# EAGLE board BatteryBalancer-Panel (EAGLE 9.1.3), part 1 of 2
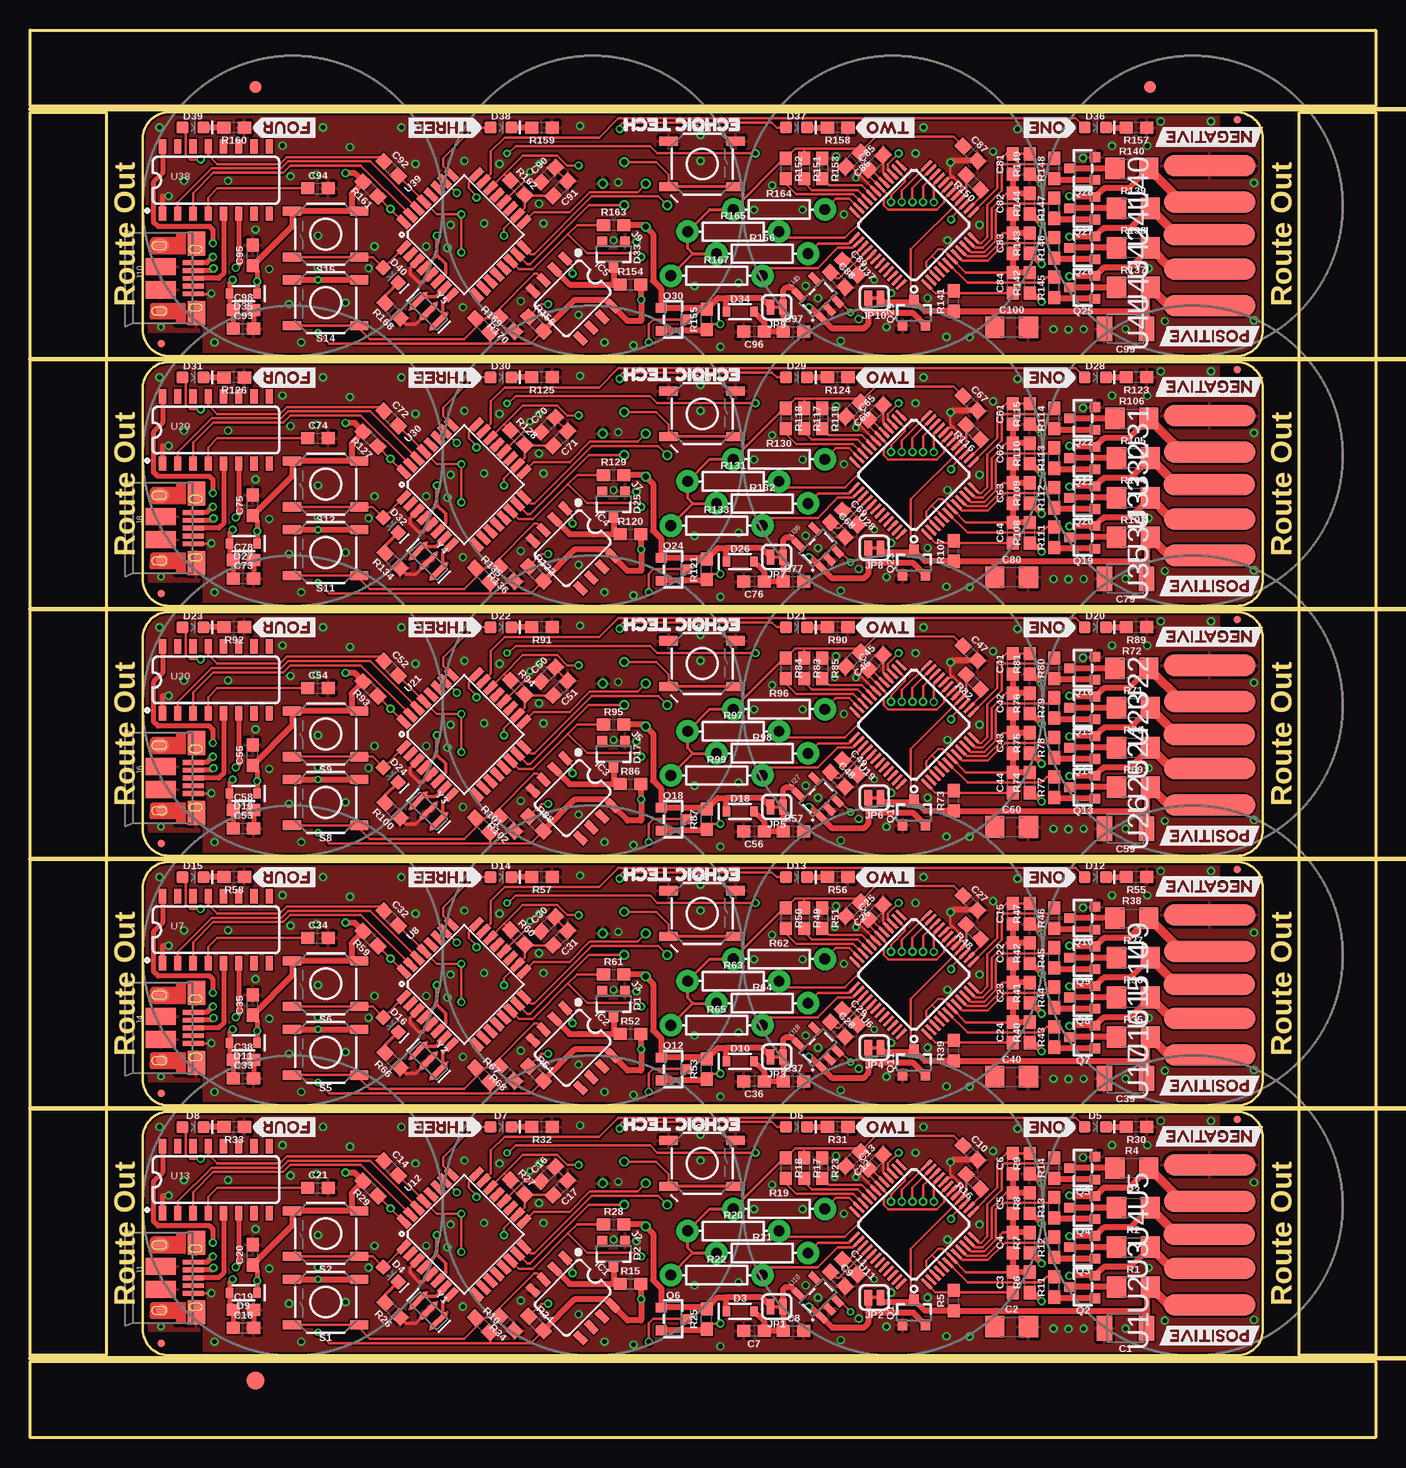
[diagram p0: board, top side]
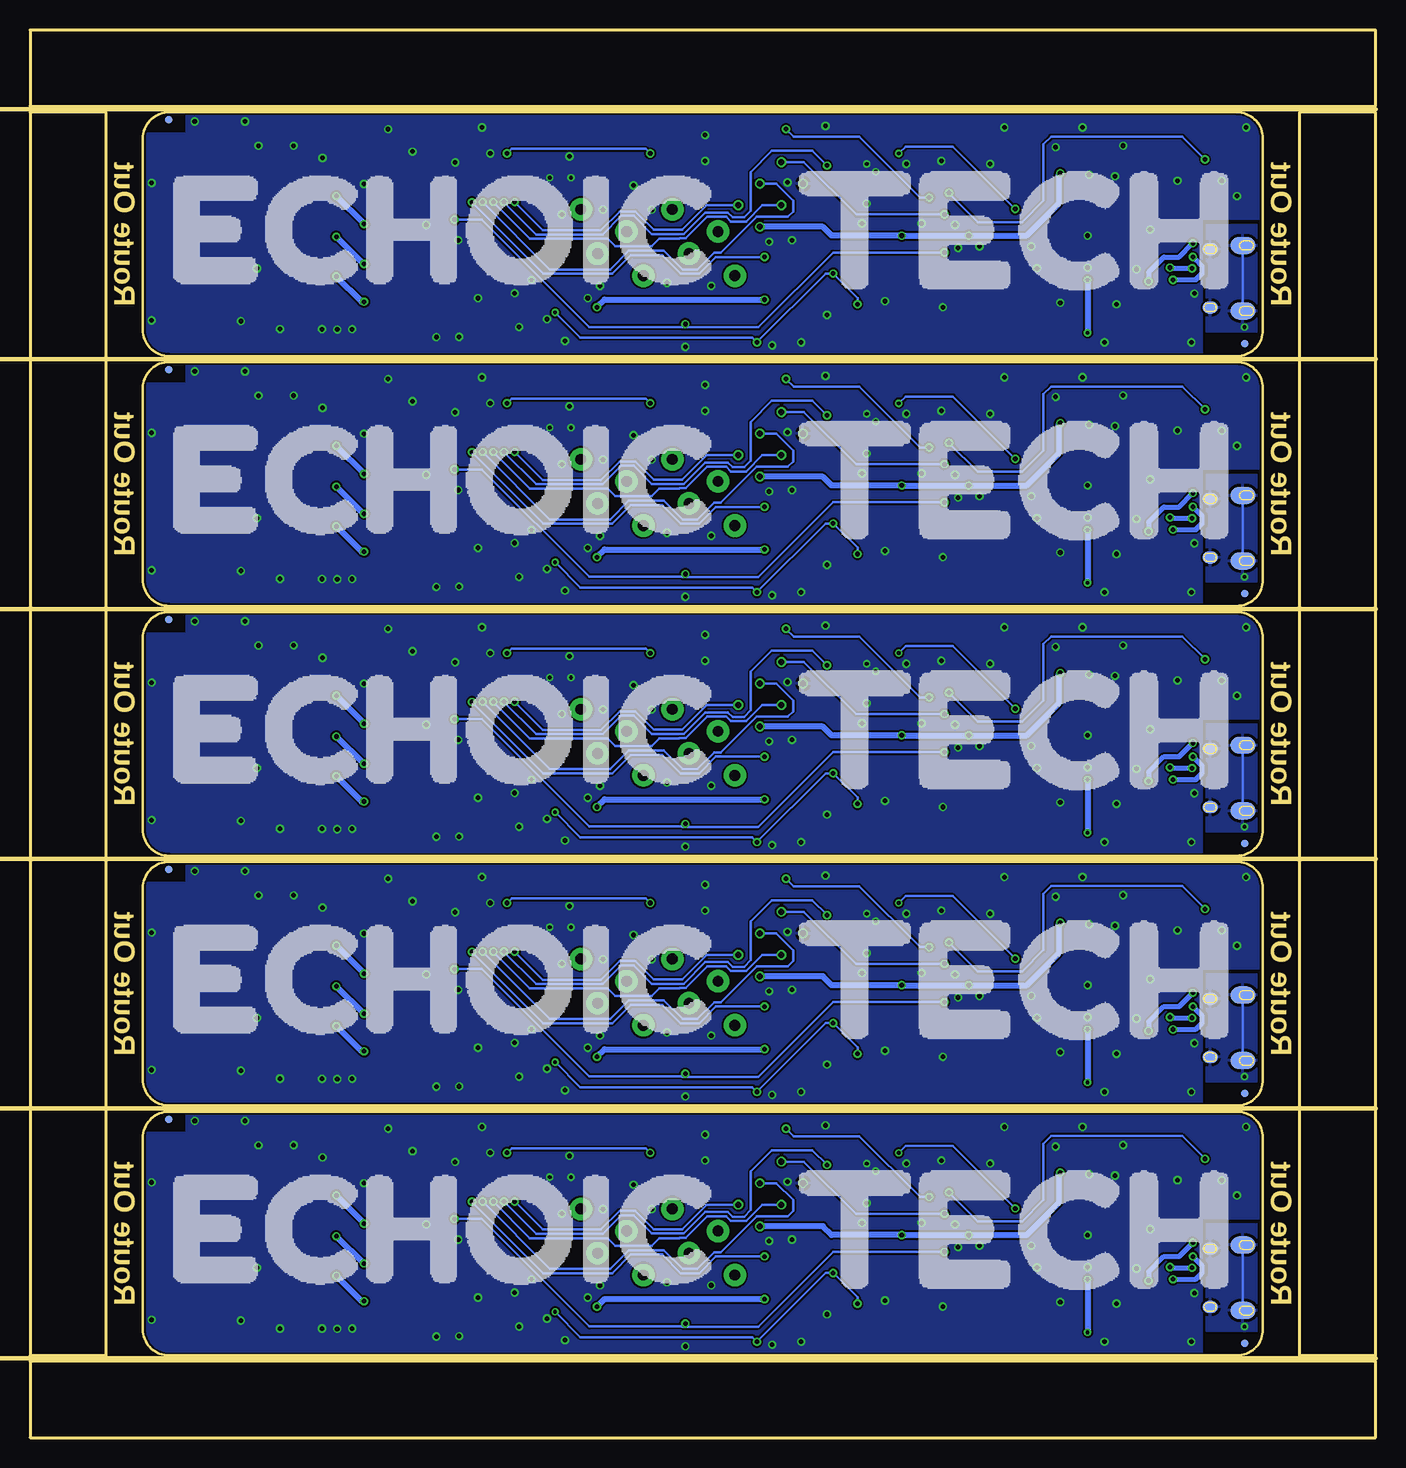
[diagram p1: board, bottom side, seen from below]

Size 112.14 x 117.35 mm. Coordinates in mm from the lower left corner, seen from the top.
Outline: 102.74,25.01 102.74,9.03 arc-90 100.58,6.86 11.57,6.86 arc-90 9.4,9.03 9.4,25.01 arc-90 11.57,27.18 100.58,27.18 arc-90 102.74,25.01
Outline: 102.74,45.84 102.74,29.85 arc-90 100.58,27.69 11.57,27.69 arc-90 9.4,29.85 9.4,45.84 arc-90 11.57,48.01 100.58,48.01 arc-90 102.74,45.84
Outline: 102.74,66.67 102.74,50.68 arc-90 100.58,48.51 11.57,48.51 arc-90 9.4,50.68 9.4,66.67 arc-90 11.57,68.83 100.58,68.83 arc-90 102.74,66.67
Outline: 102.74,87.49 102.74,71.51 arc-90 100.58,69.34 11.57,69.34 arc-90 9.4,71.51 9.4,87.49 arc-90 11.57,89.66 100.58,89.66 arc-90 102.74,87.49
Outline: 102.74,108.32 102.74,92.34 arc-90 100.58,90.17 11.57,90.17 arc-90 9.4,92.34 9.4,108.32 arc-90 11.57,110.49 100.58,110.49 arc-90 102.74,108.32
Outline: 0,6.35 112.14,6.35 112.14,0 0,0 0,6.35
Outline: 105.79,110.49 112.14,110.49 112.14,6.86 105.79,6.86 105.79,110.49
Outline: 0,117.35 112.14,117.35 112.14,111 0,111 0,117.35
Outline: 0,110.49 6.35,110.49 6.35,6.86 0,6.86 0,110.49
Copper layers (1*16): Top 0.035mm / dielectric 1.5mm / Bottom 0.035mm
Design rules "SparkFun-2-layer-PCBWay-LIMIT": minimum track width 6mil, minimum drill 0.3mm, track to track 6mil, track to pad 6mil, pad to pad 6mil, via to via 6mil, smd to smd 6mil, copper to edge 6mil, drill to drill 6mil, minimum pad ring 6mil, minimum via ring 6mil, stop-mask expansion 4mil, vias tented up to drill 25mil, thermal gap 10mil
Milling: 6 lines

## Footprints (pad centres in the part's own frame; a part is rotated, then mirrored left to right if it is on the bottom)
1210 = smd 1.27 x 2.06: 1 -1.755,0; 2 1.755,0
1206 = smd 1.6 x 1.8: 1 -1.4,0; 2 1.4,0
0603 = smd 1.1 x 1: 1 -0.85,0; 2 0.85,0
SOT23-3 = smd 0.8 x 0.9: 1 -0.95,-1; 2 0.95,-1; 3 0,1.1
SOD-323 = smd 0.63 x 0.83: A 1.15,0; C -1.15,0
LED-0603 = smd 1 x 1: A -0.877,0; C 0.877,0
FIDUCIAL-1X2 = smd 1 x 1: 1 0,0
FIDUCIAL-1.5X3 = smd 1.5 x 1.5: 1 0,0
FIDUCIAL-MICRO = smd 0.635 x 0.635: 1 0,0
SO08 = smd 0.6 x 1.2: 1 -1.905,-2.8; 2 -0.635,-2.8; 3 0.635,-2.8; 4 1.905,-2.8; 5 1.905,2.8; 6 0.635,2.8; 7 -0.635,2.8; 8 -1.905,2.8
USB-MICROB-PTH-MILL = smd 0.4 x 1.75: D+ 0,0; D- -0.65,0; GND 1.3,0; ID 0.65,0; VBUS -1.3,0 | smd 2 x 1.46: SHIELD -2.9,0.275; SHIELD2 2.9,0.275 | smd 1.425 x 2.5: SHIELD3 -0.963,-2.675; SHIELD4 0.963,-2.675 | smd 1.4 x 2.1 bottom: SHIELD5 -2.731,-2.531; SHIELD7 2.729,-2.531 | smd 1 x 1: SHIELD6 2.7,-2.575 | smd 1.1 x 1.5: SHIELD8 -2.731,-2.731 | smd 1 x 1.3 bottom: SHIELD9 -2.43,0.195; SHIELD10 2.43,0.195
2X3_TEST_POINTS = drill 0.508: 1 -2.54,-1.27; 2 -2.54,1.27; 3 0,-1.27; 4 0,1.27; 5 2.54,-1.27; 6 2.54,1.27
SMT-JUMPER_2_NC_TRACE_SILK = smd 0.635 x 1.27: 1 -0.508,0; 2 0.508,0
AXIAL-0.3 = drill 0.9 pad 1.88: P$1 -3.81,0; P$2 3.81,0
TACTILE_SWITCH_SMD_5.2MM = smd 1.524 x 0.762: 1 -2.794,1.905; 2 2.794,1.905; 3 -2.794,-1.905; 4 2.794,-1.905
1X01_SMD_0.1IN = smd 1.778 x 7.62: 1 0,0
LQFP-48 = smd 0.254 x 1.143: 1 -2.75,-4.25; 2 -2.25,-4.25; 3 -1.75,-4.25; 4 -1.25,-4.25; 5 -0.75,-4.25; 6 -0.25,-4.25; 7 0.25,-4.25; 8 0.75,-4.25; 9 1.25,-4.25; 10 1.75,-4.25; 11 2.25,-4.25; 12 2.75,-4.25; 25 2.75,4.25; 26 2.25,4.25; 27 1.75,4.25; 28 1.25,4.25; 29 0.75,4.25; 30 0.25,4.25; 31 -0.25,4.25; 32 -0.75,4.25; 33 -1.25,4.25; 34 -1.75,4.25; 35 -2.25,4.25; 36 -2.75,4.25 | smd 1.143 x 0.254: 13 4.25,-2.75; 14 4.25,-2.25; 15 4.25,-1.75; 16 4.25,-1.25; 17 4.25,-0.75; 18 4.25,-0.25; 19 4.25,0.25; 20 4.25,0.75; 21 4.25,1.25; 22 4.25,1.75; 23 4.25,2.25; 24 4.25,2.75; 37 -4.25,2.75; 38 -4.25,2.25; 39 -4.25,1.75; 40 -4.25,1.25; 41 -4.25,0.75; 42 -4.25,0.25; 43 -4.25,-0.25; 44 -4.25,-0.75; 45 -4.25,-1.25; 46 -4.25,-1.75; 47 -4.25,-2.25; 48 -4.25,-2.75
SO016 = smd 0.6 x 1.2: 1 -4.445,-2.8; 2 -3.175,-2.8; 3 -1.905,-2.8; 4 -0.635,-2.8; 5 0.635,-2.8; 6 1.905,-2.8; 7 3.175,-2.8; 8 4.445,-2.8; 9 4.445,2.8; 10 3.175,2.8; 11 1.905,2.8; 12 0.635,2.8; 13 -0.635,2.8; 14 -1.905,2.8; 15 -3.175,2.8; 16 -4.445,2.8
TQFP32-08 = smd 1.27 x 0.559: 1 -4.293,2.8; 2 -4.293,2; 3 -4.293,1.2; 4 -4.293,0.4; 5 -4.293,-0.4; 6 -4.293,-1.2; 7 -4.293,-2; 8 -4.293,-2.8; 17 4.293,-2.8; 18 4.293,-2; 19 4.293,-1.2; 20 4.293,-0.4; 21 4.293,0.4; 22 4.293,1.2; 23 4.293,2; 24 4.293,2.8 | smd 0.559 x 1.27: 9 -2.8,-4.293; 10 -2,-4.293; 11 -1.2,-4.293; 12 -0.4,-4.293; 13 0.4,-4.293; 14 1.2,-4.293; 15 2,-4.293; 16 2.8,-4.293; 25 2.8,4.293; 26 2,4.293; 27 1.2,4.293; 28 0.4,4.293; 29 -0.4,4.293; 30 -1.2,4.293; 31 -2,4.293; 32 -2.8,4.293
SOT23-5 = smd 0.55 x 1.2: 1 -0.95,-1.3; 2 0,-1.3; 3 0.95,-1.3; 4 0.95,1.3; 5 -0.95,1.3
RESONATOR-SMD-3.2X1.3 = smd 0.45 x 1.905: 1 -1.2,0; 2 0,0; 3 1.2,0

## Placement (x,y rotation side)
C1  10uF  [1210]  91.29,9.12 180 top
C2  1.0uF  [1206]  81.8,9.26 0 top
C3  0.1uF  [0603]  81.91,12.95 90 top
C4  0.1uF  [0603]  81.91,16.26 90 top
C5  0.1uF  [0603]  81.91,19.56 90 top
C6  0.1uF  [0603]  81.91,22.86 90 top
C7  1.0uF  [0603]  60.33,8.89 180 top
C8  0.1uF  [0603]  63.63,8.89 0 top
C9  1.0uF  [0603]  67.31,13.21 315 top
C10  0.1uF  [0603]  78.36,23.75 315 top
C11  1.0uF  [0603]  68.33,14.22 315 top
C12  0.1uF  [0603]  68.58,23.24 225 top
C13  1.0uF  [0603]  70.48,22.99 45 top
C14  0.1uF  [0603]  30.1,22.48 315 top
C15  0.1uF  [0603]  81.91,43.69 90 top
C16  0.1uF  [0603]  43.18,21.97 45 top
C17  0.1uF  [0603]  44.2,20.83 225 top
C18  0.1uF  [0603]  17.78,9.14 0 top
C19  1.0uF  [0603]  17.78,10.67 0 top
C20  0.1uF  [0603]  18.54,15.24 90 top
C21  10nF  [0603]  24,20.83 0 top
C22  0.1uF  [0603]  81.91,40.39 90 top
C23  0.1uF  [0603]  81.91,37.08 90 top
C24  0.1uF  [0603]  81.91,33.78 90 top
C25  1.0uF  [0603]  70.48,43.81 45 top
C26  0.1uF  [0603]  68.58,44.07 225 top
C27  0.1uF  [0603]  78.36,44.58 315 top
C28  1.0uF  [0603]  67.31,34.04 315 top
C29  1.0uF  [0603]  68.33,35.05 315 top
C30  0.1uF  [0603]  43.18,42.8 45 top
C31  0.1uF  [0603]  44.2,41.66 225 top
C32  0.1uF  [0603]  30.1,43.31 315 top
C33  0.1uF  [0603]  17.78,29.97 0 top
C34  10nF  [0603]  24,41.66 0 top
C35  0.1uF  [0603]  18.54,36.07 90 top
C36  1.0uF  [0603]  60.33,29.72 180 top
C37  0.1uF  [0603]  63.63,29.72 0 top
C38  1.0uF  [0603]  17.78,31.5 0 top
C39  10uF  [1210]  91.29,29.95 180 top
C40  1.0uF  [1206]  81.8,30.08 0 top
C41  0.1uF  [0603]  81.91,64.52 90 top
C42  0.1uF  [0603]  81.91,61.21 90 top
C43  0.1uF  [0603]  81.91,57.91 90 top
C44  0.1uF  [0603]  81.91,54.61 90 top
C45  1.0uF  [0603]  70.48,64.64 45 top
C46  0.1uF  [0603]  68.58,64.9 225 top
C47  0.1uF  [0603]  78.36,65.41 315 top
C48  1.0uF  [0603]  67.31,54.86 315 top
C49  1.0uF  [0603]  68.33,55.88 315 top
C50  0.1uF  [0603]  43.18,63.63 45 top
C51  0.1uF  [0603]  44.2,62.48 225 top
C52  0.1uF  [0603]  30.1,64.14 315 top
C53  0.1uF  [0603]  17.78,50.8 0 top
C54  10nF  [0603]  24,62.48 0 top
C55  0.1uF  [0603]  18.54,56.9 90 top
C56  1.0uF  [0603]  60.33,50.55 180 top
C57  0.1uF  [0603]  63.63,50.55 0 top
C58  1.0uF  [0603]  17.78,52.32 0 top
C59  10uF  [1210]  91.29,50.77 180 top
C60  1.0uF  [1206]  81.8,50.91 0 top
C61  0.1uF  [0603]  81.91,85.34 90 top
C62  0.1uF  [0603]  81.91,82.04 90 top
C63  0.1uF  [0603]  81.91,78.74 90 top
C64  0.1uF  [0603]  81.91,75.44 90 top
C65  1.0uF  [0603]  70.48,85.47 45 top
C66  0.1uF  [0603]  68.58,85.73 225 top
C67  0.1uF  [0603]  78.36,86.23 315 top
C68  1.0uF  [0603]  67.31,75.69 315 top
C69  1.0uF  [0603]  68.33,76.71 315 top
C70  0.1uF  [0603]  43.18,84.45 45 top
C71  0.1uF  [0603]  44.2,83.31 225 top
C72  0.1uF  [0603]  30.1,84.96 315 top
C73  0.1uF  [0603]  17.78,71.63 0 top
C74  10nF  [0603]  24,83.31 0 top
C75  0.1uF  [0603]  18.54,77.72 90 top
C76  1.0uF  [0603]  60.33,71.37 180 top
C77  0.1uF  [0603]  63.63,71.37 0 top
C78  1.0uF  [0603]  17.78,73.15 0 top
C79  10uF  [1210]  91.29,71.6 180 top
C80  1.0uF  [1206]  81.8,71.74 0 top
C81  0.1uF  [0603]  81.91,106.17 90 top
C82  0.1uF  [0603]  81.91,102.87 90 top
C83  0.1uF  [0603]  81.91,99.57 90 top
C84  0.1uF  [0603]  81.91,96.27 90 top
C85  1.0uF  [0603]  70.48,106.3 45 top
C86  0.1uF  [0603]  68.58,106.55 225 top
C87  0.1uF  [0603]  78.36,107.06 315 top
C88  1.0uF  [0603]  67.31,96.52 315 top
C89  1.0uF  [0603]  68.33,97.54 315 top
C90  0.1uF  [0603]  43.18,105.28 45 top
C91  0.1uF  [0603]  44.2,104.14 225 top
C92  0.1uF  [0603]  30.1,105.79 315 top
C93  0.1uF  [0603]  17.78,92.46 0 top
C94  10nF  [0603]  24,104.14 0 top
C95  0.1uF  [0603]  18.54,98.55 90 top
C96  1.0uF  [0603]  60.33,92.2 180 top
C97  0.1uF  [0603]  63.63,92.2 0 top
C98  1.0uF  [0603]  17.78,93.98 0 top
C99  10uF  [1210]  91.29,92.43 180 top
C100  1.0uF  [1206]  81.8,92.57 0 top
D1  TH-12V  [SOT23-3]  48.64,36.2 180 top
D2  TH-12V  [SOT23-3]  48.64,15.37 180 top
D3  3A/10V/280mV  [SOD-323]  59.18,10.54 0 top
D4  BLUE  [LED-0603]  30.06,13.6 315 top
D5  BLUE  [LED-0603]  88.77,25.91 0 top
D6  BLUE  [LED-0603]  63.88,25.91 0 top
D7  BLUE  [LED-0603]  39.24,25.91 0 top
D8  BLUE  [LED-0603]  13.59,25.9 0 top
D9  3A/10V/280mV  [SOD-323]  17.78,12.06 180 top
D10  3A/10V/280mV  [SOD-323]  59.18,31.37 0 top
D11  3A/10V/280mV  [SOD-323]  17.78,32.89 180 top
D12  BLUE  [LED-0603]  88.77,46.74 0 top
D13  BLUE  [LED-0603]  63.88,46.74 0 top
D14  BLUE  [LED-0603]  39.24,46.74 0 top
D15  BLUE  [LED-0603]  13.59,46.73 0 top
D16  BLUE  [LED-0603]  30.06,34.43 315 top
D17  TH-12V  [SOT23-3]  48.64,57.02 180 top
D18  3A/10V/280mV  [SOD-323]  59.18,52.2 0 top
D19  3A/10V/280mV  [SOD-323]  17.78,53.72 180 top
D20  BLUE  [LED-0603]  88.77,67.56 0 top
D21  BLUE  [LED-0603]  63.88,67.56 0 top
D22  BLUE  [LED-0603]  39.24,67.56 0 top
D23  BLUE  [LED-0603]  13.59,67.56 0 top
D24  BLUE  [LED-0603]  30.06,55.26 315 top
D25  TH-12V  [SOT23-3]  48.64,77.85 180 top
D26  3A/10V/280mV  [SOD-323]  59.18,73.03 0 top
D27  3A/10V/280mV  [SOD-323]  17.78,74.55 180 top
D28  BLUE  [LED-0603]  88.77,88.39 0 top
D29  BLUE  [LED-0603]  63.88,88.39 0 top
D30  BLUE  [LED-0603]  39.24,88.39 0 top
D31  BLUE  [LED-0603]  13.59,88.39 0 top
D32  BLUE  [LED-0603]  30.06,76.09 315 top
D33  TH-12V  [SOT23-3]  48.64,98.68 180 top
D34  3A/10V/280mV  [SOD-323]  59.18,93.85 0 top
D35  3A/10V/280mV  [SOD-323]  17.78,95.38 180 top
D36  BLUE  [LED-0603]  88.77,109.22 0 top
D37  BLUE  [LED-0603]  63.88,109.22 0 top
D38  BLUE  [LED-0603]  39.24,109.22 0 top
D39  BLUE  [LED-0603]  13.59,109.22 0 top
D40  BLUE  [LED-0603]  30.06,96.91 315 top
E$1  [FIDUCIAL-1X2]  18.8,112.59 0 top
E$2  [FIDUCIAL-1X2]  93.34,112.59 0 top
E$3  [FIDUCIAL-1.5X3]  18.8,4.76 0 top
FD1  FIDUCIALUFIDUCIAL  [FIDUCIAL-MICRO]  100.58,26.54 0 top
FD2  FIDUCIALUFIDUCIAL  [FIDUCIAL-MICRO]  100.58,26.54 0 bottom
FD3  FIDUCIALUFIDUCIAL  [FIDUCIAL-MICRO]  10.92,7.87 0 top
FD4  FIDUCIALUFIDUCIAL  [FIDUCIAL-MICRO]  10.92,7.87 0 bottom
FD5  FIDUCIALUFIDUCIAL  [FIDUCIAL-MICRO]  100.58,47.37 0 top
FD6  FIDUCIALUFIDUCIAL  [FIDUCIAL-MICRO]  100.58,47.37 0 bottom
FD7  FIDUCIALUFIDUCIAL  [FIDUCIAL-MICRO]  10.92,28.7 0 top
FD8  FIDUCIALUFIDUCIAL  [FIDUCIAL-MICRO]  10.92,28.7 0 bottom
FD9  FIDUCIALUFIDUCIAL  [FIDUCIAL-MICRO]  100.58,68.2 0 top
FD10  FIDUCIALUFIDUCIAL  [FIDUCIAL-MICRO]  100.58,68.2 0 bottom
FD11  FIDUCIALUFIDUCIAL  [FIDUCIAL-MICRO]  10.92,49.53 0 top
FD12  FIDUCIALUFIDUCIAL  [FIDUCIAL-MICRO]  10.92,49.53 0 bottom
FD13  FIDUCIALUFIDUCIAL  [FIDUCIAL-MICRO]  100.58,89.03 0 top
FD14  FIDUCIALUFIDUCIAL  [FIDUCIAL-MICRO]  100.58,89.03 0 bottom
FD15  FIDUCIALUFIDUCIAL  [FIDUCIAL-MICRO]  10.92,70.36 0 top
FD16  FIDUCIALUFIDUCIAL  [FIDUCIAL-MICRO]  10.92,70.36 0 bottom
FD17  FIDUCIALUFIDUCIAL  [FIDUCIAL-MICRO]  100.58,109.86 0 top
FD18  FIDUCIALUFIDUCIAL  [FIDUCIAL-MICRO]  100.58,109.86 0 bottom
FD19  FIDUCIALUFIDUCIAL  [FIDUCIAL-MICRO]  10.92,91.19 0 top
FD20  FIDUCIALUFIDUCIAL  [FIDUCIAL-MICRO]  10.92,91.19 0 bottom
IC1  OP-AMP  [SO08]  45.24,11.65 225 top
IC2  OP-AMP  [SO08]  45.24,32.48 225 top
IC3  OP-AMP  [SO08]  45.24,53.31 225 top
IC4  OP-AMP  [SO08]  45.24,74.14 225 top
IC5  OP-AMP  [SO08]  45.24,94.97 225 top
J1  [USB-MICROB-PTH-MILL]  13.59,13.34 270 top
J2  ISP  [2X3_TEST_POINTS]  50.42,20.32 135 top
J3  ISP  [2X3_TEST_POINTS]  50.42,41.15 135 top
J4  [USB-MICROB-PTH-MILL]  13.59,34.16 270 top
J5  ISP  [2X3_TEST_POINTS]  50.42,61.98 135 top
J6  [USB-MICROB-PTH-MILL]  13.59,54.99 270 top
J7  ISP  [2X3_TEST_POINTS]  50.42,82.8 135 top
J8  [USB-MICROB-PTH-MILL]  13.59,75.82 270 top
J9  ISP  [2X3_TEST_POINTS]  50.42,103.63 135 top
J10  [USB-MICROB-PTH-MILL]  13.59,96.65 270 top
JP1  VCC  [SMT-JUMPER_2_NC_TRACE_SILK]  62.23,10.92 180 top
JP2  RPP_BYP  [SMT-JUMPER_2_NC_TRACE_SILK]  70.36,11.68 180 top
JP3  VCC  [SMT-JUMPER_2_NC_TRACE_SILK]  62.23,31.75 180 top
JP4  RPP_BYP  [SMT-JUMPER_2_NC_TRACE_SILK]  70.36,32.51 180 top
JP5  VCC  [SMT-JUMPER_2_NC_TRACE_SILK]  62.23,52.58 180 top
JP6  RPP_BYP  [SMT-JUMPER_2_NC_TRACE_SILK]  70.36,53.34 180 top
JP7  VCC  [SMT-JUMPER_2_NC_TRACE_SILK]  62.23,73.41 180 top
JP8  RPP_BYP  [SMT-JUMPER_2_NC_TRACE_SILK]  70.36,74.17 180 top
JP9  VCC  [SMT-JUMPER_2_NC_TRACE_SILK]  62.23,94.23 180 top
JP10  RPP_BYP  [SMT-JUMPER_2_NC_TRACE_SILK]  70.36,95 180 top
Q1  [SOT23-3]  73.66,10.41 0 top
Q2  [SOT23-3]  87.76,12.57 90 top
Q3  [SOT23-3]  87.76,15.88 90 top
Q4  [SOT23-3]  87.76,19.18 90 top
Q5  [SOT23-3]  87.76,22.48 90 top
Q6  [SOT23-3]  53.59,9.91 270 top
Q7  [SOT23-3]  87.76,33.4 90 top
Q8  [SOT23-3]  87.76,36.7 90 top
Q9  [SOT23-3]  87.76,40 90 top
Q10  [SOT23-3]  87.76,43.31 90 top
Q11  [SOT23-3]  73.66,31.24 0 top
Q12  [SOT23-3]  53.59,30.73 270 top
Q13  [SOT23-3]  87.76,54.23 90 top
Q14  [SOT23-3]  87.76,57.53 90 top
Q15  [SOT23-3]  87.76,60.83 90 top
Q16  [SOT23-3]  87.76,64.14 90 top
Q17  [SOT23-3]  73.66,52.07 0 top
Q18  [SOT23-3]  53.59,51.56 270 top
Q19  [SOT23-3]  87.76,75.06 90 top
Q20  [SOT23-3]  87.76,78.36 90 top
Q21  [SOT23-3]  87.76,81.66 90 top
Q22  [SOT23-3]  87.76,84.96 90 top
Q23  [SOT23-3]  73.66,72.9 0 top
Q24  [SOT23-3]  53.59,72.39 270 top
Q25  [SOT23-3]  87.76,95.89 90 top
Q26  [SOT23-3]  87.76,99.19 90 top
Q27  [SOT23-3]  87.76,102.49 90 top
Q28  [SOT23-3]  87.76,105.79 90 top
Q29  [SOT23-3]  73.66,93.73 0 top
Q30  [SOT23-3]  53.59,93.22 270 top
R1  10  [1206]  91.95,12.57 0 top
R2  10  [1206]  91.95,15.88 0 top
R3  10  [1206]  91.95,19.18 0 top
R4  10  [1206]  91.82,22.48 0 top
R5  10k  [0603]  76.96,11.43 90 top
R6  10k  [0603]  83.31,12.95 90 top
R7  10k  [0603]  83.31,16.26 90 top
R8  10k  [0603]  83.31,19.56 90 top
R9  10k  [0603]  83.31,22.86 90 top
R10  330k  [0603]  37.72,9.4 315 top
R11  10k  [0603]  85.34,12.57 90 top
R12  10k  [0603]  85.34,15.88 90 top
R13  10k  [0603]  85.34,19.18 90 top
R14  10k  [0603]  85.34,22.48 90 top
R15  330k  [0603]  50.04,12.83 0 top
R16  10k  [0603]  78.61,21.34 135 top
R17  10k  [0603]  64.52,22.48 270 top
R18  10k  [0603]  62.99,22.48 270 top
R19  DNP  [AXIAL-0.3]  62.42,19.07 0 top
R20  DNP  [AXIAL-0.3]  58.61,17.23 0 top
R21  DNP  [AXIAL-0.3]  61.03,15.39 0 top
R22  DNP  [AXIAL-0.3]  57.22,13.55 0 top
R23  10k  [0603]  66.04,22.48 270 top
R24  10k  [0603]  42.16,9.52 315 top
R25  10k  [0603]  56.39,9.91 90 top
R26  10k  [0603]  30.2,10.65 135 top
R27  10k  [0603]  40.64,20.89 315 top
R28  10k  [0603]  48.64,17.78 0 top
R29  10k  [0603]  28.38,20.76 135 top
R30  1k  [0603]  92.2,25.91 180 top
R31  1k  [0603]  67.31,25.91 180 top
R32  1k  [0603]  42.67,25.91 180 top
R33  1k  [0603]  17.02,25.9 180 top
R34  10M  [0603]  39.75,9.52 135 top
R35  10  [1206]  91.95,33.4 0 top
R36  10  [1206]  91.95,36.7 0 top
R37  10  [1206]  91.95,40 0 top
R38  10  [1206]  91.82,43.31 0 top
R39  10k  [0603]  76.96,32.26 90 top
R40  10k  [0603]  83.31,33.78 90 top
R41  10k  [0603]  83.31,37.08 90 top
R42  10k  [0603]  83.31,40.39 90 top
R43  10k  [0603]  85.34,33.4 90 top
R44  10k  [0603]  85.34,36.7 90 top
R45  10k  [0603]  85.34,40 90 top
R46  10k  [0603]  85.34,43.31 90 top
R47  10k  [0603]  83.31,43.69 90 top
R48  10k  [0603]  78.61,42.16 135 top
R49  10k  [0603]  64.52,43.31 270 top
R50  10k  [0603]  62.99,43.31 270 top
R51  10k  [0603]  66.04,43.31 270 top
R52  330k  [0603]  50.04,33.66 0 top
R53  10k  [0603]  56.39,30.73 90 top
R54  10k  [0603]  42.16,30.35 315 top
R55  1k  [0603]  92.2,46.74 180 top
R56  1k  [0603]  67.31,46.74 180 top
R57  1k  [0603]  42.67,46.74 180 top
R58  1k  [0603]  17.02,46.73 180 top
R59  10k  [0603]  28.38,41.59 135 top
R60  10k  [0603]  40.64,41.72 315 top
R61  10k  [0603]  48.64,38.61 0 top
R62  DNP  [AXIAL-0.3]  62.42,39.9 0 top
R63  DNP  [AXIAL-0.3]  58.61,38.06 0 top
R64  DNP  [AXIAL-0.3]  61.03,36.22 0 top
R65  DNP  [AXIAL-0.3]  57.22,34.38 0 top
R66  10k  [0603]  30.2,31.48 135 top
R67  330k  [0603]  37.72,30.23 315 top
R68  10M  [0603]  39.75,30.35 135 top
R69  10  [1206]  91.95,54.23 0 top
R70  10  [1206]  91.95,57.53 0 top
R71  10  [1206]  91.95,60.83 0 top
R72  10  [1206]  91.82,64.14 0 top
R73  10k  [0603]  76.96,53.09 90 top
R74  10k  [0603]  83.31,54.61 90 top
R75  10k  [0603]  83.31,57.91 90 top
R76  10k  [0603]  83.31,61.21 90 top
R77  10k  [0603]  85.34,54.23 90 top
R78  10k  [0603]  85.34,57.53 90 top
R79  10k  [0603]  85.34,60.83 90 top
R80  10k  [0603]  85.34,64.14 90 top
R81  10k  [0603]  83.31,64.52 90 top
R82  10k  [0603]  78.61,62.99 135 top
R83  10k  [0603]  64.52,64.14 270 top
R84  10k  [0603]  62.99,64.14 270 top
R85  10k  [0603]  66.04,64.14 270 top
R86  330k  [0603]  50.04,54.48 0 top
R87  10k  [0603]  56.39,51.56 90 top
R88  10k  [0603]  42.16,51.18 315 top
R89  1k  [0603]  92.2,67.56 180 top
R90  1k  [0603]  67.31,67.56 180 top
R91  1k  [0603]  42.67,67.56 180 top
R92  1k  [0603]  17.02,67.56 180 top
R93  10k  [0603]  28.38,62.42 135 top
R94  10k  [0603]  40.64,62.54 315 top
R95  10k  [0603]  48.64,59.44 0 top
R96  DNP  [AXIAL-0.3]  62.42,60.73 0 top
R97  DNP  [AXIAL-0.3]  58.61,58.89 0 top
R98  DNP  [AXIAL-0.3]  61.03,57.05 0 top
R99  DNP  [AXIAL-0.3]  57.22,55.21 0 top
R100  10k  [0603]  30.2,52.31 135 top
R101  330k  [0603]  37.72,51.05 315 top
R102  10M  [0603]  39.75,51.18 135 top
R103  10  [1206]  91.95,75.06 0 top
R104  10  [1206]  91.95,78.36 0 top
R105  10  [1206]  91.95,81.66 0 top
R106  10  [1206]  91.82,84.96 0 top
R107  10k  [0603]  76.96,73.91 90 top
R108  10k  [0603]  83.31,75.44 90 top
R109  10k  [0603]  83.31,78.74 90 top
R110  10k  [0603]  83.31,82.04 90 top
R111  10k  [0603]  85.34,75.06 90 top
R112  10k  [0603]  85.34,78.36 90 top
R113  10k  [0603]  85.34,81.66 90 top
R114  10k  [0603]  85.34,84.96 90 top
R115  10k  [0603]  83.31,85.34 90 top
R116  10k  [0603]  78.61,83.82 135 top
R117  10k  [0603]  64.52,84.96 270 top
R118  10k  [0603]  62.99,84.96 270 top
R119  10k  [0603]  66.04,84.96 270 top
R120  330k  [0603]  50.04,75.31 0 top
R121  10k  [0603]  56.39,72.39 90 top
R122  10k  [0603]  42.16,72.01 315 top
R123  1k  [0603]  92.2,88.39 180 top
R124  1k  [0603]  67.31,88.39 180 top
R125  1k  [0603]  42.67,88.39 180 top
R126  1k  [0603]  17.02,88.39 180 top
R127  10k  [0603]  28.38,83.25 135 top
R128  10k  [0603]  40.64,83.37 315 top
R129  10k  [0603]  48.64,80.26 0 top
R130  DNP  [AXIAL-0.3]  62.42,81.56 0 top
R131  DNP  [AXIAL-0.3]  58.61,79.72 0 top
R132  DNP  [AXIAL-0.3]  61.03,77.88 0 top
R133  DNP  [AXIAL-0.3]  57.22,76.03 0 top
R134  10k  [0603]  30.2,73.14 135 top
R135  330k  [0603]  37.72,71.88 315 top
R136  10M  [0603]  39.75,72.01 135 top
R137  10  [1206]  91.95,95.89 0 top
R138  10  [1206]  91.95,99.19 0 top
R139  10  [1206]  91.95,102.49 0 top
R140  10  [1206]  91.82,105.79 0 top
R141  10k  [0603]  76.96,94.74 90 top
R142  10k  [0603]  83.31,96.27 90 top
R143  10k  [0603]  83.31,99.57 90 top
R144  10k  [0603]  83.31,102.87 90 top
R145  10k  [0603]  85.34,95.89 90 top
R146  10k  [0603]  85.34,99.19 90 top
R147  10k  [0603]  85.34,102.49 90 top
R148  10k  [0603]  85.34,105.79 90 top
R149  10k  [0603]  83.31,106.17 90 top
R150  10k  [0603]  78.61,104.65 135 top
R151  10k  [0603]  64.52,105.79 270 top
R152  10k  [0603]  62.99,105.79 270 top
R153  10k  [0603]  66.04,105.79 270 top
R154  330k  [0603]  50.04,96.14 0 top
R155  10k  [0603]  56.39,93.22 90 top
R156  10k  [0603]  42.16,92.84 315 top
R157  1k  [0603]  92.2,109.22 180 top
R158  1k  [0603]  67.31,109.22 180 top
R159  1k  [0603]  42.67,109.22 180 top
R160  1k  [0603]  17.02,109.22 180 top
R161  10k  [0603]  28.38,104.08 135 top
R162  10k  [0603]  40.64,104.2 315 top
R163  10k  [0603]  48.64,101.09 0 top
R164  DNP  [AXIAL-0.3]  62.42,102.39 0 top
R165  DNP  [AXIAL-0.3]  58.61,100.54 0 top
R166  DNP  [AXIAL-0.3]  61.03,98.7 0 top
R167  DNP  [AXIAL-0.3]  57.22,96.86 0 top
R168  10k  [0603]  30.2,93.97 135 top
R169  330k  [0603]  37.72,92.71 315 top
R170  10M  [0603]  39.75,92.84 135 top
S1  Force Charge  [TACTILE_SWITCH_SMD_5.2MM]  24.64,11.3 180 top
S2  TEST  [TACTILE_SWITCH_SMD_5.2MM]  24.64,17.02 180 top
S3  Tall Switch  [TACTILE_SWITCH_SMD_5.2MM]  56,22.87 0 top
S4  Tall Switch  [TACTILE_SWITCH_SMD_5.2MM]  56,43.69 0 top
S5  Force Charge  [TACTILE_SWITCH_SMD_5.2MM]  24.64,32.13 180 top
S6  TEST  [TACTILE_SWITCH_SMD_5.2MM]  24.64,37.85 180 top
S7  Tall Switch  [TACTILE_SWITCH_SMD_5.2MM]  56,64.52 0 top
S8  Force Charge  [TACTILE_SWITCH_SMD_5.2MM]  24.64,52.96 180 top
S9  TEST  [TACTILE_SWITCH_SMD_5.2MM]  24.64,58.67 180 top
S10  Tall Switch  [TACTILE_SWITCH_SMD_5.2MM]  56,85.35 0 top
S11  Force Charge  [TACTILE_SWITCH_SMD_5.2MM]  24.64,73.79 180 top
S12  TEST  [TACTILE_SWITCH_SMD_5.2MM]  24.64,79.5 180 top
S13  Tall Switch  [TACTILE_SWITCH_SMD_5.2MM]  56,106.18 0 top
S14  Force Charge  [TACTILE_SWITCH_SMD_5.2MM]  24.64,94.62 180 top
S15  TEST  [TACTILE_SWITCH_SMD_5.2MM]  24.64,100.33 180 top
U1  TAP_POINT  [1X01_SMD_0.1IN]  98.3,11.07 90 top
U2  TAP_POINT  [1X01_SMD_0.1IN]  98.3,14.11 90 top
U3  TAP_POINT  [1X01_SMD_0.1IN]  98.27,16.97 90 top
U4  TAP_POINT  [1X01_SMD_0.1IN]  98.3,19.69 90 top
U5  TAP_POINT  [1X01_SMD_0.1IN]  98.3,22.73 90 top
U6  AD7280A  [LQFP-48]  73.66,38.61 45 top
U7  CH340C  [SO016]  15.49,42.35 0 top
U8  ATMEGA328P_TQFP  [TQFP32-08]  36.17,37.79 45 top
U9  TAP_POINT  [1X01_SMD_0.1IN]  98.3,43.56 90 top
U10  MCP1755  [SOT23-5]  65.66,11.68 45 top
U11  AD7280A  [LQFP-48]  73.66,17.78 45 top
U12  ATMEGA328P_TQFP  [TQFP32-08]  36.17,16.97 45 top
U13  CH340C  [SO016]  15.49,21.52 0 top
U14  TAP_POINT  [1X01_SMD_0.1IN]  98.3,40.52 90 top
U15  TAP_POINT  [1X01_SMD_0.1IN]  98.27,37.8 90 top
U16  TAP_POINT  [1X01_SMD_0.1IN]  98.3,34.94 90 top
U17  TAP_POINT  [1X01_SMD_0.1IN]  98.3,31.9 90 top
U18  MCP1755  [SOT23-5]  65.66,32.51 45 top
U19  AD7280A  [LQFP-48]  73.66,59.44 45 top
U20  CH340C  [SO016]  15.49,63.18 0 top
U21  ATMEGA328P_TQFP  [TQFP32-08]  36.17,58.62 45 top
U22  TAP_POINT  [1X01_SMD_0.1IN]  98.3,64.39 90 top
U23  TAP_POINT  [1X01_SMD_0.1IN]  98.3,61.35 90 top
U24  TAP_POINT  [1X01_SMD_0.1IN]  98.27,58.63 90 top
U25  TAP_POINT  [1X01_SMD_0.1IN]  98.3,55.77 90 top
U26  TAP_POINT  [1X01_SMD_0.1IN]  98.3,52.73 90 top
U27  MCP1755  [SOT23-5]  65.66,53.34 45 top
U28  AD7280A  [LQFP-48]  73.66,80.26 45 top
U29  CH340C  [SO016]  15.49,84 0 top
U30  ATMEGA328P_TQFP  [TQFP32-08]  36.17,79.45 45 top
U31  TAP_POINT  [1X01_SMD_0.1IN]  98.3,85.22 90 top
U32  TAP_POINT  [1X01_SMD_0.1IN]  98.3,82.18 90 top
U33  TAP_POINT  [1X01_SMD_0.1IN]  98.27,79.45 90 top
U34  TAP_POINT  [1X01_SMD_0.1IN]  98.3,76.6 90 top
U35  TAP_POINT  [1X01_SMD_0.1IN]  98.3,73.56 90 top
U36  MCP1755  [SOT23-5]  65.66,74.17 45 top
U37  AD7280A  [LQFP-48]  73.66,101.09 45 top
U38  CH340C  [SO016]  15.49,104.83 0 top
U39  ATMEGA328P_TQFP  [TQFP32-08]  36.17,100.28 45 top
U40  TAP_POINT  [1X01_SMD_0.1IN]  98.3,106.05 90 top
U41  TAP_POINT  [1X01_SMD_0.1IN]  98.3,103.01 90 top
U42  TAP_POINT  [1X01_SMD_0.1IN]  98.27,100.28 90 top
U43  TAP_POINT  [1X01_SMD_0.1IN]  98.3,97.42 90 top
U44  TAP_POINT  [1X01_SMD_0.1IN]  98.3,94.39 90 top
U45  MCP1755  [SOT23-5]  65.66,95 45 top
U$1  [POSITIVE1]  102.55,8.51 180 top
U$2  [NEGATIVE0]  102.79,25.12 180 top
U$3  [ONE3]  87.17,25.89 180 top
U$4  [TWO4]  74.17,25.89 180 top
U$5  [THREE6]  37.67,25.89 180 top
U$6  [FOUR5]  24.3,25.89 180 top
U$7  [ECHOIC_TECH7]  60.05,26.14 180 top
U$8  [ECHOIC#JPG]  77.98,17.02 0 bottom
U$9  [TECH#JPG]  29.72,17.02 0 bottom
U$10  [NEGATIVE0]  102.79,45.95 180 top
U$11  [POSITIVE1]  102.55,29.34 180 top
U$12  [ONE3]  87.17,46.72 180 top
U$13  [TWO4]  74.17,46.72 180 top
U$14  [THREE6]  37.67,46.72 180 top
U$15  [FOUR5]  24.3,46.72 180 top
U$16  [ECHOIC_TECH7]  60.05,46.97 180 top
U$17  [ECHOIC#JPG]  77.98,37.85 0 bottom
U$18  [TECH#JPG]  29.72,37.85 0 bottom
U$19  [NEGATIVE0]  102.79,66.78 180 top
U$20  [POSITIVE1]  102.55,50.17 180 top
U$21  [ONE3]  87.17,67.54 180 top
U$22  [TWO4]  74.17,67.54 180 top
U$23  [THREE6]  37.67,67.54 180 top
U$24  [FOUR5]  24.3,67.54 180 top
U$25  [ECHOIC_TECH7]  60.05,67.79 180 top
U$26  [ECHOIC#JPG]  77.98,58.67 0 bottom
U$27  [TECH#JPG]  29.72,58.67 0 bottom
U$28  [NEGATIVE0]  102.79,87.6 180 top
U$29  [POSITIVE1]  102.55,71 180 top
U$30  [ONE3]  87.17,88.37 180 top
U$31  [TWO4]  74.17,88.37 180 top
U$32  [THREE6]  37.67,88.37 180 top
U$33  [FOUR5]  24.3,88.37 180 top
U$34  [ECHOIC_TECH7]  60.05,88.62 180 top
U$35  [ECHOIC#JPG]  77.98,79.5 0 bottom
U$36  [TECH#JPG]  29.72,79.5 0 bottom
U$37  [NEGATIVE0]  102.79,108.43 180 top
U$38  [POSITIVE1]  102.55,91.83 180 top
U$39  [ONE3]  87.17,109.2 180 top
U$40  [TWO4]  74.17,109.2 180 top
U$41  [THREE6]  37.67,109.2 180 top
U$42  [FOUR5]  24.3,109.2 180 top
U$43  [ECHOIC_TECH7]  60.05,109.45 180 top
U$44  [ECHOIC#JPG]  77.98,100.33 0 bottom
U$45  [TECH#JPG]  29.72,100.33 0 bottom
Y1  16MHz  [RESONATOR-SMD-3.2X1.3]  33.21,10.59 315 top
Y2  16MHz  [RESONATOR-SMD-3.2X1.3]  33.21,31.42 315 top
Y3  16MHz  [RESONATOR-SMD-3.2X1.3]  33.21,52.25 315 top
Y4  16MHz  [RESONATOR-SMD-3.2X1.3]  33.21,73.07 315 top
Y5  16MHz  [RESONATOR-SMD-3.2X1.3]  33.21,93.9 315 top

## Library data of the parts
C1 C39 C59 C79 C99 = SparkFun-Capacitors; PROD_ID: CAP-09824
C2 C40 C60 C80 C100 = SparkFun-Capacitors; PROD_ID: CAP-09822
C3-C6 C8 C10 C12 C15 C22-C24 C26 C27 C37 C41-C44 C46 C47 C57 C61-C64 C66 C67 C77 C81-C84 C86 C87 C97 = SparkFun-Capacitors; PROD_ID: CAP-08604
C7 C9 C11 C13 C19 C25 C28 C29 C36 C38 C45 C48 C49 C56 C58 C65 C68 C69 C76 C78 C85 C88 C89 C96 C98 = SparkFun-Capacitors; PROD_ID: CAP-13930
C14 C16-C18 C20 C30-C33 C35 C50-C53 C55 C70-C73 C75 C90-C93 C95 = SparkFun-Capacitors; PROD_ID: CAP-00810
C21 C34 C54 C74 C94 = SparkFun-Capacitors; PROD_ID: CAP-00867
D1 D2 D17 D25 D33 = SparkFun-DiscreteSemi; PROD_ID: DIO-14123
D3 D9-D11 D18 D19 D26 D27 D34 D35 = SparkFun-DiscreteSemi; PROD_ID: DIO-14072
D4-D8 D12-D16 D20-D24 D28-D32 D36-D40 = SparkFun-LED; PROD_ID: DIO-08575
E$1 E$2 FD1-FD20 = SparkFun-Aesthetics
E$3 = SparkFun-Retired
IC1-IC5 = SparkFun-IC-Amplifiers; PROD_ID: NA-XXXXX
J1 J4 J6 J8 J10 = SparkFun-Connectors; PROD_ID: CONN-13711
J2 J3 J5 J7 J9 = SparkFun-Connectors
JP1-JP10 = SparkFun-Jumpers
Q1 Q11 Q17 Q23 Q29 = SparkFun-DiscreteSemi; PROD_ID: TRANS-11153
Q2-Q10 Q12-Q16 Q18-Q22 Q24-Q28 Q30 = MTAES_V2_UniqueParts
R1-R4 R35-R38 R69-R72 R103-R106 R137-R140 = SparkFun-Resistors; PROD_ID: RES-08705
R5-R9 R11-R14 R16-R18 R23-R29 R39-R51 R53 R54 R59-R61 R66 R73-R85 R87 R88 R93-R95 R100 R107-R119 R121 R122 R127-R129 R134 R141-R153 R155 R156 R161-R163 R168 = SparkFun-Resistors; PROD_ID: RES-00824
R10 R15 R52 R67 R86 R101 R120 R135 R154 R169 = SparkFun-Resistors; PROD_ID: RES-08968
R19-R22 R62-R65 R96-R99 R130-R133 R164-R167 U1-U6 U9-U11 U14-U19 U22-U28 U31-U37 U40-U45 = BBLib
R30-R33 R55-R58 R89-R92 R123-R126 R157-R160 = SparkFun-Resistors; PROD_ID: RES-07856
R34 R68 R102 R136 R170 = SparkFun-Resistors; PROD_ID: RES-08283
S1-S15 = SparkFun-Switches; PROD_ID: SWCH-14139
U7 U13 U20 U29 U38 = SparkFun-IC-Comms; PROD_ID: IC-14038
U8 U12 U21 U30 U39 = SparkFun-IC-Microcontroller; PROD_ID: IC-09069
U$1-U$7 U$10-U$16 U$19-U$25 U$28-U$34 U$37-U$43 = buzzard_labels_0
U$8 U$17 U$26 U$35 U$44 = echoic#JPG
U$9 U$18 U$27 U$36 U$45 = tech#JPG
Y1-Y5 = SparkFun-Clocks; PROD_ID: XTAL-08900

## Nets
5V: C7.1 C8.1 D3.A JP1.1 U10.5
5V1: C36.1 C37.1 D10.A JP3.1 U18.5
5V2: C56.1 C57.1 D18.A JP5.1 U27.5
5V3: C76.1 C77.1 D26.A JP7.1 U36.5
5V4: C96.1 C97.1 D34.A JP9.1 U45.5
!CS: R28.1 U11.21 U12.14
!CS1: R61.1 U6.21 U8.14
!CS2: R95.1 U19.21 U21.14
!CS3: R129.1 U28.21 U30.14
!CS4: R163.1 U37.21 U39.14
!CVNST: R27.1 U11.24 U12.22
!CVNST1: R60.1 U6.24 U8.22
!CVNST2: R94.1 U19.24 U21.22
!CVNST3: R128.1 U28.24 U30.22
!CVNST4: R162.1 U37.24 U39.22
!DTR: C14.1 U13.13
!DTR1: C32.1 U7.13
!DTR2: C52.1 U20.13
!DTR3: C72.1 U29.13
!DTR4: C92.1 U38.13
!RESET: C14.2 J2.5 Q6.2 R25.1 S3.3 S3.4 U11.15 U12.29
!RESET1: C32.2 J3.5 Q12.2 R53.1 S4.3 S4.4 U6.15 U8.29
!RESET2: C52.2 J5.5 Q18.2 R87.1 S7.3 S7.4 U19.15 U21.29
!RESET3: C72.2 J7.5 Q24.2 R121.1 S10.3 S10.4 U28.15 U30.29
!RESET4: C92.2 J9.5 Q30.2 R155.1 S13.3 S13.4 U37.15 U39.29
ALERT: R29.1 U11.27 U12.32
ALERT1: R59.1 U6.27 U8.32
ALERT2: R93.1 U19.27 U21.32
ALERT3: R127.1 U28.27 U30.32
ALERT4: R161.1 U37.27 U39.32
AREF: C16.1 U12.20
AREF1: C30.1 U8.20
AREF2: C50.1 U21.20
AREF3: C70.1 U30.20
AREF4: C90.1 U39.20
CHARGE: IC1.1 Q6.3 R24.1 U10.3
CHARGE1: IC2.1 Q12.3 R54.1 U18.3
CHARGE2: IC3.1 Q18.3 R88.1 U27.3
CHARGE3: IC4.1 Q24.3 R122.1 U36.3
CHARGE4: IC5.1 Q30.3 R156.1 U45.3
D+: J1.D+ U13.5
D+1: J4.D+ U7.5
D+2: J6.D+ U20.5
D+3: J8.D+ U29.5
D+4: J10.D+ U38.5
D-: J1.D- U13.6
D-1: J4.D- U7.6
D-2: J6.D- U20.6
D-3: J8.D- U29.6
D-4: J10.D- U38.6
GND: C1.2 C2.2 C7.2 C8.2 C9.2 C10.2 C11.2 C12.2 C13.2 C16.2 C17.1 C18.2 C19.2 C20.2 C21.2 D2.1 IC1.4 J1.GND J2.6 Q1.1 Q5.2 R9.1 R23.1 R26.1 R30.1 R31.1 R32.1 R33.1 R34.1 S3.1 S3.2 U5.1 U10.2 U11.17 U11.20 U11.28 U11.31 U11.41 U12.3 U12.5 U12.21 U13.1 Y1.2
GND1: C25.2 C26.2 C27.2 C28.2 C29.2 C30.2 C31.1 C33.2 C34.2 C35.2 C36.2 C37.2 C38.2 C39.2 C40.2 D1.1 IC2.4 J3.6 J4.GND Q10.2 Q11.1 R47.1 R51.1 R55.1 R56.1 R57.1 R58.1 R66.1 R68.1 S4.1 S4.2 U6.17 U6.20 U6.28 U6.31 U6.41 U7.1 U8.3 U8.5 U8.21 U9.1 U18.2 Y2.2
GND2: C45.2 C46.2 C47.2 C48.2 C49.2 C50.2 C51.1 C53.2 C54.2 C55.2 C56.2 C57.2 C58.2 C59.2 C60.2 D17.1 IC3.4 J5.6 J6.GND Q16.2 Q17.1 R81.1 R85.1 R89.1 R90.1 R91.1 R92.1 R100.1 R102.1 S7.1 S7.2 U19.17 U19.20 U19.28 U19.31 U19.41 U20.1 U21.3 U21.5 U21.21 U22.1 U27.2 Y3.2
GND3: C65.2 C66.2 C67.2 C68.2 C69.2 C70.2 C71.1 C73.2 C74.2 C75.2 C76.2 C77.2 C78.2 C79.2 C80.2 D25.1 IC4.4 J7.6 J8.GND Q22.2 Q23.1 R115.1 R119.1 R123.1 R124.1 R125.1 R126.1 R134.1 R136.1 S10.1 S10.2 U28.17 U28.20 U28.28 U28.31 U28.41 U29.1 U30.3 U30.5 U30.21 U31.1 U36.2 Y4.2
GND4: C85.2 C86.2 C87.2 C88.2 C89.2 C90.2 C91.1 C93.2 C94.2 C95.2 C96.2 C97.2 C98.2 C99.2 C100.2 D33.1 IC5.4 J9.6 J10.GND Q28.2 Q29.1 R149.1 R153.1 R157.1 R158.1 R159.1 R160.1 R168.1 R170.1 S13.1 S13.2 U37.17 U37.20 U37.28 U37.31 U37.41 U38.1 U39.3 U39.5 U39.21 U40.1 U45.2 Y5.2
LED1: D5.A U12.23
LED2: D6.A U12.24
LED3: D7.A U12.25
LED4: D8.A U12.26
LED5: D12.A U8.23
LED6: D13.A U8.24
LED7: D14.A U8.25
LED8: D15.A U8.26
LED9: D20.A U21.23
LED10: D21.A U21.24
LED11: D22.A U21.25
LED12: D23.A U21.26
LED13: D28.A U30.23
LED14: D29.A U30.24
LED15: D30.A U30.25
LED16: D31.A U30.26
LED17: D36.A U39.23
LED18: D37.A U39.24
LED19: D38.A U39.25
LED20: D39.A U39.26
MISO: J2.1 U11.26 U12.16
MISO1: J3.1 U6.26 U8.16
MISO2: J5.1 U19.26 U21.16
MISO3: J7.1 U28.26 U30.16
MISO4: J9.1 U37.26 U39.16
MOSI: J2.4 U11.23 U12.15
MOSI1: J3.4 U6.23 U8.15
MOSI2: J5.4 U19.23 U21.15
MOSI3: J7.4 U28.23 U30.15
MOSI4: J9.4 U37.23 U39.15
N$1: Q7.3 R35.1
N$2: Q7.2 R36.2 R40.1 U16.1
N$3: U12.7 Y1.1
N$4: U12.8 Y1.3
N$5: Q2.3 R1.1
N$6: Q2.2 R2.2 R6.1 U2.1
N$7: Q3.3 R2.1
N$8: Q3.2 R3.2 R7.1 U3.1
N$9: Q4.3 R3.1
N$10: Q4.2 R4.2 R8.1 U4.1
N$11: Q5.3 R4.1
N$12: Q2.1 R11.1
N$13: Q3.1 R12.1
N$14: R16.1 U11.14
N$15: Q4.1 R13.1
N$16: Q5.1 R14.1
N$17: C6.2 R9.2 U11.13
N$18: R14.2 U11.12
N$19: C5.2 C6.1 R8.2 U11.11
N$20: R13.2 U11.10
N$21: C4.2 C5.1 R7.2 U11.9
N$22: R12.2 U11.8
N$23: R22.P$2 U11.38
N$24: R11.2 U11.6
N$25: C3.1 R5.2 U11.1
N$26: C3.2 C4.1 R6.2 U11.3 U11.5 U11.7
N$27: C9.1 U11.40
N$28: R17.2 U11.33
N$29: C11.1 U11.39
N$30: R23.2 U11.32
N$31: R18.2 U11.34
N$32: R21.P$2 U11.37
N$33: R20.P$2 U11.36
N$34: R19.P$2 U11.35
N$35: Q8.3 R36.1
N$36: Q8.2 R37.2 R41.1 U15.1
N$37: D4.C R26.2
N$38: C21.1 U13.4
N$39: D8.C R33.2
N$40: IC1.3 R10.1 R34.2 S1.1 S1.2
N$41: D2.3 IC1.2 R15.1
N$42: D7.C R32.2
N$43: D6.C R31.2
N$44: D5.C R30.2
N$45: Q9.3 R37.1
N$46: Q9.2 R38.2 R42.1 U14.1
N$47: Q10.3 R38.1
N$48: Q7.1 R43.1
N$49: Q8.1 R44.1
N$50: Q9.1 R45.1
N$51: Q10.1 R46.1
N$52: C15.2 R47.2 U6.13
N$53: R46.2 U6.12
N$54: C15.1 C22.2 R42.2 U6.11
N$55: R45.2 U6.10
N$56: C22.1 C23.2 R41.2 U6.9
N$57: R44.2 U6.8
N$58: R43.2 U6.6
N$59: C24.1 R39.2 U6.1
N$60: C23.1 C24.2 R40.2 U6.3 U6.5 U6.7
N$61: R48.1 U6.14
N$62: C28.1 U6.40
N$63: C29.1 U6.39
N$64: R51.2 U6.32
N$65: R49.2 U6.33
N$66: R50.2 U6.34
N$67: U8.7 Y2.1
N$68: U8.8 Y2.3
N$69: C34.1 U7.4
N$70: D1.3 IC2.2 R52.1
N$71: IC2.3 R67.1 R68.2 S5.1 S5.2
N$72: D15.C R58.2
N$73: D14.C R57.2
N$74: D13.C R56.2
N$75: D12.C R55.2
N$76: R65.P$2 U6.38
N$77: R64.P$2 U6.37
N$78: R63.P$2 U6.36
N$79: R62.P$2 U6.35
N$80: D16.C R66.2
N$81: Q13.3 R69.1
N$82: Q13.2 R70.2 R74.1 U25.1
N$83: Q14.3 R70.1
N$84: Q14.2 R71.2 R75.1 U24.1
N$85: Q15.3 R71.1
N$86: Q15.2 R72.2 R76.1 U23.1
N$87: Q16.3 R72.1
N$88: Q13.1 R77.1
N$89: Q14.1 R78.1
N$90: Q15.1 R79.1
N$91: Q16.1 R80.1
N$92: C41.2 R81.2 U19.13
N$93: R80.2 U19.12
N$94: C41.1 C42.2 R76.2 U19.11
N$95: R79.2 U19.10
N$96: C42.1 C43.2 R75.2 U19.9
N$97: R78.2 U19.8
N$98: R77.2 U19.6
N$99: C44.1 R73.2 U19.1
N$100: C43.1 C44.2 R74.2 U19.3 U19.5 U19.7
N$101: R82.1 U19.14
N$102: C48.1 U19.40
N$103: C49.1 U19.39
N$104: R85.2 U19.32
N$105: R83.2 U19.33
N$106: R84.2 U19.34
N$107: U21.7 Y3.1
N$108: U21.8 Y3.3
N$109: C54.1 U20.4
N$110: D17.3 IC3.2 R86.1
N$111: IC3.3 R101.1 R102.2 S8.1 S8.2
N$112: D23.C R92.2
N$113: D22.C R91.2
N$114: D21.C R90.2
N$115: D20.C R89.2
N$116: R99.P$2 U19.38
N$117: R98.P$2 U19.37
N$118: R97.P$2 U19.36
N$119: R96.P$2 U19.35
N$120: D24.C R100.2
N$121: Q19.3 R103.1
N$122: Q19.2 R104.2 R108.1 U34.1
N$123: Q20.3 R104.1
N$124: Q20.2 R105.2 R109.1 U33.1
N$125: Q21.3 R105.1
N$126: Q21.2 R106.2 R110.1 U32.1
N$127: Q22.3 R106.1
N$128: Q19.1 R111.1
N$129: Q20.1 R112.1
N$130: Q21.1 R113.1
N$131: Q22.1 R114.1
N$132: C61.2 R115.2 U28.13
N$133: R114.2 U28.12
N$134: C61.1 C62.2 R110.2 U28.11
N$135: R113.2 U28.10
N$136: C62.1 C63.2 R109.2 U28.9
N$137: R112.2 U28.8
N$138: R111.2 U28.6
N$139: C64.1 R107.2 U28.1
N$140: C63.1 C64.2 R108.2 U28.3 U28.5 U28.7
N$141: R116.1 U28.14
N$142: C68.1 U28.40
N$143: C69.1 U28.39
N$144: R119.2 U28.32
N$145: R117.2 U28.33
N$146: R118.2 U28.34
N$147: U30.7 Y4.1
N$148: U30.8 Y4.3
N$149: C74.1 U29.4
N$150: D25.3 IC4.2 R120.1
N$151: IC4.3 R135.1 R136.2 S11.1 S11.2
N$152: D31.C R126.2
N$153: D30.C R125.2
N$154: D29.C R124.2
N$155: D28.C R123.2
N$156: R133.P$2 U28.38
N$157: R132.P$2 U28.37
N$158: R131.P$2 U28.36
N$159: R130.P$2 U28.35
N$160: D32.C R134.2
N$161: Q25.3 R137.1
N$162: Q25.2 R138.2 R142.1 U43.1
N$163: Q26.3 R138.1
N$164: Q26.2 R139.2 R143.1 U42.1
N$165: Q27.3 R139.1
N$166: Q27.2 R140.2 R144.1 U41.1
N$167: Q28.3 R140.1
N$168: Q25.1 R145.1
N$169: Q26.1 R146.1
N$170: Q27.1 R147.1
N$171: Q28.1 R148.1
N$172: C81.2 R149.2 U37.13
N$173: R148.2 U37.12
N$174: C81.1 C82.2 R144.2 U37.11
N$175: R147.2 U37.10
N$176: C82.1 C83.2 R143.2 U37.9
N$177: R146.2 U37.8
N$178: R145.2 U37.6
N$179: C84.1 R141.2 U37.1
N$180: C83.1 C84.2 R142.2 U37.3 U37.5 U37.7
N$181: R150.1 U37.14
N$182: C88.1 U37.40
N$183: C89.1 U37.39
N$184: R153.2 U37.32
N$185: R151.2 U37.33
N$186: R152.2 U37.34
N$187: U39.7 Y5.1
N$188: U39.8 Y5.3
N$189: C94.1 U38.4
N$190: D33.3 IC5.2 R154.1
N$191: IC5.3 R169.1 R170.2 S14.1 S14.2
N$192: D39.C R160.2
N$193: D38.C R159.2
N$194: D37.C R158.2
N$195: D36.C R157.2
N$196: R167.P$2 U37.38
N$197: R166.P$2 U37.37
N$198: R165.P$2 U37.36
N$199: R164.P$2 U37.35
N$200: D40.C R168.2
RX-I: U12.30 U13.2
RX-I1: U7.2 U8.30
RX-I2: U20.2 U21.30
RX-I3: U29.2 U30.30
RX-I4: U38.2 U39.30
SCLK: J2.3 U11.22 U12.17
SCLK1: J3.3 U6.22 U8.17
SCLK2: J5.3 U19.22 U21.17
SCLK3: J7.3 U28.22 U30.17
SCLK4: J9.3 U37.22 U39.17
SHLD: J1.SHIELD J1.SHIELD2 J1.SHIELD3 J1.SHIELD4 J1.SHIELD5 J1.SHIELD6 J1.SHIELD7 J1.SHIELD8 J1.SHIELD9 J1.SHIELD10
SHLD1: J4.SHIELD J4.SHIELD2 J4.SHIELD3 J4.SHIELD4 J4.SHIELD5 J4.SHIELD6 J4.SHIELD7 J4.SHIELD8 J4.SHIELD9 J4.SHIELD10
SHLD2: J6.SHIELD J6.SHIELD2 J6.SHIELD3 J6.SHIELD4 J6.SHIELD5 J6.SHIELD6 J6.SHIELD7 J6.SHIELD8 J6.SHIELD9 J6.SHIELD10
SHLD3: J8.SHIELD J8.SHIELD2 J8.SHIELD3 J8.SHIELD4 J8.SHIELD5 J8.SHIELD6 J8.SHIELD7 J8.SHIELD8 J8.SHIELD9 J8.SHIELD10
SHLD4: J10.SHIELD J10.SHIELD2 J10.SHIELD3 J10.SHIELD4 J10.SHIELD5 J10.SHIELD6 J10.SHIELD7 J10.SHIELD8 J10.SHIELD9 J10.SHIELD10
TEST: D4.A S2.1 S2.2 U12.1
TEST1: D16.A S6.1 S6.2 U8.1
TEST2: D24.A S9.1 S9.2 U21.1
TEST3: D32.A S12.1 S12.2 U30.1
TEST4: D40.A S15.1 S15.2 U39.1
TX-O: U12.31 U13.3
TX-O1: U7.3 U8.31
TX-O2: U20.3 U21.31
TX-O3: U29.3 U30.31
TX-O4: U38.3 U39.31
USBVCC: C18.1 C19.1 D9.A J1.VBUS
USBVCC1: C33.1 C38.1 D11.A J4.VBUS
USBVCC2: C53.1 C58.1 D19.A J6.VBUS
USBVCC3: C73.1 C78.1 D27.A J8.VBUS
USBVCC4: C93.1 C98.1 D35.A J10.VBUS
V_BATT: IC1.8 JP2.2 Q1.2 R10.2 R15.2 R24.2 S1.3 S1.4 U10.1
V_BATT1: IC2.8 JP4.2 Q11.2 R52.2 R54.2 R67.2 S5.3 S5.4 U18.1
V_BATT2: IC3.8 JP6.2 Q17.2 R86.2 R88.2 R101.2 S8.3 S8.4 U27.1
V_BATT3: IC4.8 JP8.2 Q23.2 R120.2 R122.2 R135.2 S11.3 S11.4 U36.1
V_BATT4: IC5.8 JP10.2 Q29.2 R154.2 R156.2 R169.2 S14.3 S14.4 U45.1
V_RAW: C1.1 C2.1 JP2.1 Q1.3 R1.2 R5.1 R16.2 U1.1 U11.16
V_RAW1: C39.1 C40.1 JP4.1 Q11.3 R35.2 R39.1 R48.2 U6.16 U17.1
V_RAW2: C59.1 C60.1 JP6.1 Q17.3 R69.2 R73.1 R82.2 U19.16 U26.1
V_RAW3: C79.1 C80.1 JP8.1 Q23.3 R103.2 R107.1 R116.2 U28.16 U35.1
V_RAW4: C99.1 C100.1 JP10.1 Q29.3 R137.2 R141.1 R150.2 U37.16 U44.1
VCC: C17.2 C20.1 D3.C D9.C J2.2 JP1.2 Q6.1 R25.2 R27.2 R28.2 R29.2 S2.3 S2.4 U12.4 U12.6 U12.18 U13.16
VCC1: C31.2 C35.1 D10.C D11.C J3.2 JP3.2 Q12.1 R53.2 R59.2 R60.2 R61.2 S6.3 S6.4 U7.16 U8.4 U8.6 U8.18
VCC2: C51.2 C55.1 D18.C D19.C J5.2 JP5.2 Q18.1 R87.2 R93.2 R94.2 R95.2 S9.3 S9.4 U20.16 U21.4 U21.6 U21.18
VCC3: C71.2 C75.1 D26.C D27.C J7.2 JP7.2 Q24.1 R121.2 R127.2 R128.2 R129.2 S12.3 S12.4 U29.16 U30.4 U30.6 U30.18
VCC4: C91.2 C95.1 D34.C D35.C J9.2 JP9.2 Q30.1 R155.2 R161.2 R162.2 R163.2 S15.3 S15.4 U38.16 U39.4 U39.6 U39.18
VREG: C10.1 C12.1 C13.1 R17.1 R18.1 R19.P$1 R20.P$1 R21.P$1 R22.P$1 U11.18 U11.19 U11.29 U11.30
VREG1: C25.1 C26.1 C27.1 R49.1 R50.1 R62.P$1 R63.P$1 R64.P$1 R65.P$1 U6.18 U6.19 U6.29 U6.30
VREG2: C45.1 C46.1 C47.1 R83.1 R84.1 R96.P$1 R97.P$1 R98.P$1 R99.P$1 U19.18 U19.19 U19.29 U19.30
VREG3: C65.1 C66.1 C67.1 R117.1 R118.1 R130.P$1 R131.P$1 R132.P$1 R133.P$1 U28.18 U28.19 U28.29 U28.30
VREG4: C85.1 C86.1 C87.1 R151.1 R152.1 R164.P$1 R165.P$1 R166.P$1 R167.P$1 U37.18 U37.19 U37.29 U37.30

## Tracks (layer width: path | path; a pad name or v marks a point on that pad's centre or on a via)
5V
  Top 0.508: U10.5 63.46,12.54 62.95,12.54 62.74,12.32 JP1.1 62.78,10.88 C8.1 C7.1 61.17,9.7 D3.A
5V1
  Top 0.508: U18.5 63.46,33.36 62.95,33.36 62.74,33.15 JP3.1 62.78,31.71 C37.1 C36.1 61.17,30.53 D10.A
5V2
  Top 0.508: U27.5 63.46,54.19 62.95,54.19 62.74,53.97 JP5.1 62.78,52.54 C57.1 C56.1 61.17,51.35 D18.A
5V3
  Top 0.508: U36.5 63.46,75.02 62.95,75.02 62.74,74.8 JP7.1 62.78,73.37 C77.1 C76.1 61.17,72.18 D26.A
5V4
  Top 0.508: U45.5 63.46,95.85 62.95,95.85 62.74,95.63 JP9.1 62.78,94.2 C97.1 C96.1 61.17,93.01 D34.A
!CS  (via drill 0.38)
  Top 0.203: U11.21 75.31,21.2 v75.31,19.67 | U12.14 40.73,14.1 41.91,14.1 44.83,17.02 | v50.93,15.11 50.61,15.43 46.42,15.43 44.83,17.02 | R28.1 45.59,17.78 44.83,17.02
  Bottom 0.203: v75.31,19.67 69.36,13.72 63.63,13.72 62.08,15.27 59.46,15.27 57.91,13.72 56.39,13.72 54.99,15.11 v50.93,15.11
!CS1  (via drill 0.38)
  Top 0.203: U6.21 75.31,42.03 v75.31,40.5 | U8.14 40.73,34.92 41.91,34.92 44.83,37.85 | v50.93,35.94 50.61,36.26 46.42,36.26 44.83,37.85 | R61.1 45.59,38.61 44.83,37.85
  Bottom 0.203: v75.31,40.5 69.36,34.54 63.63,34.54 62.08,36.09 59.46,36.09 57.91,34.54 56.39,34.54 54.99,35.94 v50.93,35.94
!CS2  (via drill 0.38)
  Top 0.203: U19.21 75.31,62.85 v75.31,61.33 | U21.14 40.73,55.75 41.91,55.75 44.83,58.68 | v50.93,56.77 50.61,57.09 46.42,57.09 44.83,58.68 | R95.1 45.59,59.44 44.83,58.68
  Bottom 0.203: v75.31,61.33 69.36,55.37 63.63,55.37 62.08,56.92 59.46,56.92 57.91,55.37 56.39,55.37 54.99,56.77 v50.93,56.77
!CS3  (via drill 0.38)
  Top 0.203: U28.21 75.31,83.68 v75.31,82.16 | U30.14 40.73,76.58 41.91,76.58 44.83,79.51 | v50.93,77.6 50.61,77.91 46.42,77.91 44.83,79.51 | R129.1 45.59,80.26 44.83,79.51
  Bottom 0.203: v75.31,82.16 69.36,76.2 63.63,76.2 62.08,77.75 59.46,77.75 57.91,76.2 56.39,76.2 54.99,77.6 v50.93,77.6
!CS4  (via drill 0.38)
  Top 0.203: U37.21 75.31,104.51 v75.31,102.98 | U39.14 40.73,97.41 41.91,97.41 44.83,100.33 | v50.93,98.42 50.61,98.74 46.42,98.74 44.83,100.33 | R163.1 45.59,101.09 44.83,100.33
  Bottom 0.203: v75.31,102.98 69.36,97.03 63.63,97.03 62.08,98.58 59.46,98.58 57.91,97.03 56.39,97.03 54.99,98.42 v50.93,98.42
!CVNST  (via drill 0.38)
  Top 0.203: U11.24 72.64,20.65 v72.64,19.68 | U12.22 39.49,21.98 | R27.1 39.55,21.98 39.49,21.98 | v45.72,22.73 44.76,22.73 43.92,23.57 41.08,23.57 39.49,21.98
  Bottom 0.203: v72.64,19.68 69.95,16.99 64.41,16.99 62.86,18.54 61.85,18.54 60.33,17.02 57.66,17.02 55.86,18.81 53.98,18.81 53.59,18.43 52.63,18.43 52.07,18.98 52.07,22.2 50.31,23.95 46.94,23.95 v45.72,22.73
!CVNST1  (via drill 0.38)
  Top 0.203: U6.24 72.64,41.48 v72.64,40.51 | U8.22 39.49,42.81 | R60.1 39.55,42.81 39.49,42.81 | v45.72,43.56 44.76,43.56 43.92,44.4 41.08,44.4 39.49,42.81
  Bottom 0.203: v72.64,40.51 69.95,37.82 64.41,37.82 62.86,39.37 61.85,39.37 60.33,37.85 57.66,37.85 55.86,39.64 53.98,39.64 53.59,39.25 52.63,39.25 52.07,39.81 52.07,43.02 50.31,44.78 46.94,44.78 v45.72,43.56
!CVNST2  (via drill 0.38)
  Top 0.203: U19.24 72.64,62.31 v72.64,61.34 | U21.22 39.49,63.64 | R94.1 39.55,63.64 39.49,63.64 | v45.72,64.39 44.76,64.39 43.92,65.22 41.08,65.22 39.49,63.64
  Bottom 0.203: v72.64,61.34 69.95,58.65 64.41,58.65 62.86,60.2 61.85,60.2 60.33,58.67 57.66,58.67 55.86,60.47 53.98,60.47 53.59,60.08 52.63,60.08 52.07,60.64 52.07,63.85 50.31,65.61 46.94,65.61 v45.72,64.39
!CVNST3  (via drill 0.38)
  Top 0.203: U28.24 72.64,83.14 v72.64,82.17 | U30.22 39.49,84.46 | R128.1 39.55,84.46 39.49,84.46 | v45.72,85.22 44.76,85.22 43.92,86.05 41.08,86.05 39.49,84.46
  Bottom 0.203: v72.64,82.17 69.95,79.48 64.41,79.48 62.86,81.03 61.85,81.03 60.33,79.5 57.66,79.5 55.86,81.3 53.98,81.3 53.59,80.91 52.63,80.91 52.07,81.47 52.07,84.68 50.31,86.44 46.94,86.44 v45.72,85.22
!CVNST4  (via drill 0.38)
  Top 0.203: U37.24 72.64,103.97 v72.64,103 | U39.22 39.49,105.29 | R162.1 39.55,105.29 39.49,105.29 | v45.72,106.05 44.76,106.05 43.92,106.88 41.08,106.88 39.49,105.29
  Bottom 0.203: v72.64,103 69.95,100.31 64.41,100.31 62.86,101.85 61.85,101.85 60.33,100.33 57.66,100.33 55.86,102.12 53.98,102.12 53.59,101.74 52.63,101.74 52.07,102.3 52.07,105.51 50.31,107.27 46.94,107.27 v45.72,106.05
!DTR
  Top 0.203: U13.13 14.86,23.62 15.62,22.86 20.8,22.86 21.38,23.44 29.13,23.44 C14.1
!DTR1
  Top 0.203: U7.13 14.86,44.45 15.62,43.69 20.8,43.69 21.38,44.27 29.13,44.27 C32.1
!DTR2
  Top 0.203: U20.13 14.86,65.28 15.62,64.52 20.8,64.52 21.38,65.1 29.13,65.1 C52.1
!DTR3
  Top 0.203: U29.13 14.86,86.11 15.62,85.34 20.8,85.34 21.38,85.93 29.13,85.93 C72.1
!DTR4
  Top 0.203: U38.13 14.86,106.93 15.62,106.17 20.8,106.17 21.38,106.76 29.13,106.76 C92.1
!RESET  (via drill 0.38)
  Top 0.203: U11.15 76.76,18.41 v76.76,18.23 | v57.53,9.51 56.84,9.51 R25.1 | J2.5 52.17,23.01 53.21,21.97 S3.3 | 32.89,19.68 33.9,18.67 v35.94,18.67 v35.94,15.49 | 32.89,19.68 U12.29 | C14.2 32.89,19.69 32.89,19.68
  Top 0.254: S3.4 S3.3
  Top 0.508: R25.1 56.29,8.96 Q6.2
  Bottom 0.203: v35.94,18.67 43.31,18.67 47.65,23.01 J2.5 | v35.94,15.49 45.21,15.49 51.45,9.26 57.53,9.26 | 57.53,9.26 57.78,9.26 57.76,9.28 65.53,9.28 74.48,18.23 v76.76,18.23 | v57.53,9.51 57.53,9.26
!RESET1  (via drill 0.38)
  Top 0.203: U6.15 76.76,39.23 v76.76,39.06 | v57.53,30.34 56.84,30.34 R53.1 | J3.5 52.17,43.84 53.21,42.8 S4.3 | 32.89,40.51 33.9,39.5 v35.94,39.5 v35.94,36.32 | 32.89,40.51 U8.29 | C32.2 32.89,40.52 32.89,40.51
  Top 0.254: S4.4 S4.3
  Top 0.508: R53.1 56.29,29.78 Q12.2
  Bottom 0.203: v35.94,39.5 43.31,39.5 47.65,43.84 J3.5 | v35.94,36.32 45.21,36.32 51.45,30.09 57.53,30.09 | 57.53,30.09 57.78,30.09 57.76,30.11 65.53,30.11 74.48,39.06 v76.76,39.06 | v57.53,30.34 57.53,30.09
!RESET2  (via drill 0.38)
  Top 0.203: U19.15 76.76,60.06 v76.76,59.89 | v57.53,51.17 56.84,51.17 R87.1 | J5.5 52.17,64.67 53.21,63.63 S7.3 | 32.89,61.34 33.9,60.32 v35.94,60.32 v35.94,57.15 | 32.89,61.34 U21.29 | C52.2 32.89,61.34
  Top 0.254: S7.4 S7.3
  Top 0.508: R87.1 56.29,50.61 Q18.2
  Bottom 0.203: v35.94,60.32 43.31,60.32 47.65,64.67 J5.5 | v35.94,57.15 45.21,57.15 51.45,50.91 57.53,50.91 | 57.53,50.91 57.78,50.91 57.76,50.94 65.53,50.94 74.48,59.89 v76.76,59.89 | v57.53,51.17 57.53,50.91
!RESET3  (via drill 0.38)
  Top 0.203: U28.15 76.76,80.89 v76.76,80.72 | v57.53,72 56.84,72 R121.1 | J7.5 52.17,85.5 53.21,84.46 S10.3 | 32.89,82.17 33.9,81.15 v35.94,81.15 v35.94,77.98 | 32.89,82.17 U30.29 | C72.2 32.89,82.17
  Top 0.254: S10.4 S10.3
  Top 0.508: R121.1 56.29,71.44 Q24.2
  Bottom 0.203: v35.94,81.15 43.31,81.15 47.65,85.5 J7.5 | v35.94,77.98 45.21,77.98 51.45,71.74 57.53,71.74 | 57.53,71.74 57.78,71.74 57.76,71.77 65.53,71.77 74.48,80.72 v76.76,80.72 | v57.53,72 57.53,71.74
!RESET4  (via drill 0.38)
  Top 0.203: U37.15 76.76,101.72 v76.76,101.55 | v57.53,92.82 56.84,92.82 R155.1 | J9.5 52.17,106.33 53.21,105.29 S13.3 | 32.89,102.99 33.9,101.98 v35.94,101.98 v35.94,98.81 | 32.89,102.99 U39.29 | C92.2 32.89,103 32.89,102.99
  Top 0.254: S13.4 S13.3
  Top 0.508: R155.1 56.29,92.27 Q30.2
  Bottom 0.203: v35.94,101.98 43.31,101.98 47.65,106.33 J9.5 | v35.94,98.81 45.21,98.81 51.45,92.57 57.53,92.57 | 57.53,92.57 57.78,92.57 57.76,92.6 65.53,92.6 74.48,101.55 v76.76,101.55 | v57.53,92.82 57.53,92.57
ALERT  (via drill 0.3, 0.38)
  Top 0.203: U11.27 71.5,22.42 71.5,22.86 v72.39,23.75 | R29.1 v30.03,19.11 31.12,18.02 U12.32 | v39.75,23.75 39.86,23.75 40.47,24.36 51.67,24.36 52.28,23.75 v60.45,23.75
  Bottom 0.203: v72.39,23.75 72.01,24.13 60.83,24.13 v60.45,23.75 | v30.03,19.11 35.24,24.32 39.18,24.32 v39.75,23.75
ALERT1  (via drill 0.3, 0.38)
  Top 0.203: U6.27 71.5,43.24 71.5,43.68 v72.39,44.58 | R59.1 v30.03,39.94 31.12,38.85 U8.32 | v39.75,44.58 39.86,44.58 40.47,45.19 51.67,45.19 52.28,44.58 v60.45,44.58
  Bottom 0.203: v72.39,44.58 72.01,44.96 60.83,44.96 v60.45,44.58 | v30.03,39.94 35.24,45.15 39.18,45.15 v39.75,44.58
ALERT2  (via drill 0.3, 0.38)
  Top 0.203: U19.27 71.5,64.07 71.5,64.51 v72.39,65.41 | R93.1 v30.03,60.77 31.12,59.68 U21.32 | v39.75,65.41 39.86,65.41 40.47,66.02 51.67,66.02 52.28,65.41 v60.45,65.41
  Bottom 0.203: v72.39,65.41 72.01,65.79 60.83,65.79 v60.45,65.41 | v30.03,60.77 35.24,65.98 39.18,65.98 v39.75,65.41
ALERT3  (via drill 0.3, 0.38)
  Top 0.203: U28.27 71.5,84.9 71.5,85.34 v72.39,86.23 | R127.1 v30.03,81.6 31.12,80.51 U30.32 | v39.75,86.23 39.86,86.23 40.47,86.84 51.67,86.84 52.28,86.23 v60.45,86.23
  Bottom 0.203: v72.39,86.23 72.01,86.61 60.83,86.61 v60.45,86.23 | v30.03,81.6 35.24,86.81 39.18,86.81 v39.75,86.23
ALERT4  (via drill 0.3, 0.38)
  Top 0.203: U37.27 71.5,105.73 71.5,106.17 v72.39,107.06 | R161.1 v30.03,102.42 31.12,101.33 U39.32 | v39.75,107.06 39.86,107.06 40.47,107.67 51.67,107.67 52.28,107.06 v60.45,107.06
  Bottom 0.203: v72.39,107.06 72.01,107.44 60.83,107.44 v60.45,107.06 | v30.03,102.42 35.24,107.63 39.18,107.63 v39.75,107.06
AREF
  Top 0.203: U12.20 41.14,21.37 C16.1
AREF1
  Top 0.203: U8.20 41.14,42.2 C30.1
AREF2
  Top 0.203: U21.20 41.14,63.03 C50.1
AREF3
  Top 0.203: U30.20 41.14,83.85 C70.1
AREF4
  Top 0.203: U39.20 41.14,104.68 C90.1
CHARGE  (via drill 0.3, 0.38)
  Top 0.203: R24.1 42.61,11.18 v43.18,11.18 | v51.56,8 51.56,9.52 51.94,9.91 Q6.3 | IC1.1 45.21,14.38 v45.21,13.73 | v68.38,10.49 67.43,11.44 U10.3
  Bottom 0.203: v43.18,11.18 43.18,11.7 v45.21,13.73 45.84,13.73 51.56,8.01 v51.56,8 51.94,8.38 66.27,8.38 v68.38,10.49
CHARGE1  (via drill 0.3, 0.38)
  Top 0.203: R54.1 42.61,32 v43.18,32 | v51.56,28.83 51.56,30.35 51.94,30.73 Q12.3 | IC2.1 45.21,35.21 v45.21,34.56 | v68.38,31.32 67.43,32.26 U18.3
  Bottom 0.203: v43.18,32 43.18,32.53 v45.21,34.56 45.84,34.56 v51.56,28.84 v51.56,28.83 51.94,29.21 66.27,29.21 v68.38,31.32
CHARGE2  (via drill 0.3, 0.38)
  Top 0.203: R88.1 42.61,52.83 v43.18,52.83 | v51.56,49.66 51.56,51.18 51.94,51.56 Q18.3 | IC3.1 45.21,56.04 v45.21,55.38 | v68.38,52.15 67.43,53.09 U27.3
  Bottom 0.203: v43.18,52.83 43.18,53.36 v45.21,55.38 45.84,55.38 v51.56,49.67 v51.56,49.66 51.94,50.04 66.27,50.04 v68.38,52.15
CHARGE3  (via drill 0.3, 0.38)
  Top 0.203: R122.1 42.61,73.66 v43.18,73.66 | v51.56,70.48 51.56,72.01 51.94,72.39 Q24.3 | IC4.1 45.21,76.87 v45.21,76.21 | v68.38,72.97 67.43,73.92 U36.3
  Bottom 0.203: v43.18,73.66 43.18,74.18 v45.21,76.21 45.84,76.21 v51.56,70.49 v51.56,70.48 51.94,70.87 66.27,70.87 v68.38,72.97
CHARGE4  (via drill 0.3, 0.38)
  Top 0.203: R156.1 42.61,94.49 v43.18,94.49 | v51.56,91.31 51.56,92.84 51.94,93.22 Q30.3 | IC5.1 45.21,97.7 v45.21,97.04 | v68.38,93.8 67.43,94.75 U45.3
  Bottom 0.203: v43.18,94.49 43.18,95.01 v45.21,97.04 45.84,97.04 51.56,91.32 v51.56,91.31 51.94,91.69 66.27,91.69 v68.38,93.8
D+
  Top 0.406: J1.D+ 15.75,13.34 16.13,13.72 U13.5
D+1
  Top 0.406: J4.D+ 15.75,34.16 16.13,34.54 U7.5
D+2
  Top 0.406: J6.D+ 15.75,54.99 16.13,55.37 U20.5
D+3
  Top 0.406: J8.D+ 15.75,75.82 16.13,76.2 U29.5
D+4
  Top 0.406: J10.D+ 15.75,96.65 16.13,97.03 U38.5
D-  (via drill 0.38)
  Top 0.406: J1.D- 15.12,13.98 v15.3,14.16 | v17.14,14.22 17.4,14.48 U13.6
  Bottom 0.406: v15.3,14.16 17.09,14.16 v17.14,14.22
D-1  (via drill 0.38)
  Top 0.406: J4.D- 15.12,34.81 v15.3,34.99 | v17.14,35.05 17.4,35.31 U7.6
  Bottom 0.406: v15.3,34.99 17.09,34.99 v17.14,35.05
D-2  (via drill 0.38)
  Top 0.406: J6.D- 15.12,55.64 v15.3,55.82 | v17.14,55.88 17.4,56.13 U20.6
  Bottom 0.406: v15.3,55.82 17.09,55.82 v17.14,55.88
D-3  (via drill 0.38)
  Top 0.406: J8.D- 15.12,76.47 v15.3,76.65 | v17.14,76.71 17.4,76.96 U29.6
  Bottom 0.406: v15.3,76.65 17.09,76.65 v17.14,76.71
D-4  (via drill 0.38)
  Top 0.406: J10.D- 15.12,97.3 v15.3,97.48 | v17.14,97.54 17.4,97.79 U38.6
  Bottom 0.406: v15.3,97.48 17.09,97.48 v17.14,97.54
GND  (via drill 0.3, 0.38)
  Top 0.203: U11.20 76.54,21.72 76.96,21.72 | U11.17 77.6,20.66 77.6,21.08 76.96,21.72 | U11.41 68.93,14.11 C11.2 | U11.28 71.09,22.12 C13.2 | C12.2 68.45,22.64 U11.31 | 76.96,21.72 76.71,21.97 v76.71,22.99 | J1.GND 15.08,12.04 v15.11,12.06 | C17.1 43.78,22.45 C16.2
  Top 0.305: U12.3 31.68,14.17 31.68,13.73 32.4,13.01 32.78,13.01 U12.5 | Y1.2 32.14,9.52 31.33,9.52 R26.1
  Top 0.406: C19.2 C18.2 | U13.1 11.05,20.19 v11.56,20.19
  Top 0.508: R9.1 83.6,21.72 83.8,21.72 v84.3,21.21 | C10.2 76.87,23.15 v76.71,22.99